# Altium PCB JTAG_USB.PcbDoc (part 2 of 2)
Units mil, origin at the board's own origin, x right, y up, seen from the top; angles counter-clockwise.
Board outline 1370 x 2285 mil, 4 copper layers (Top Layer, Int1 (GND), Int2 (PWR), Bottom Layer), stack 62.468 mil thick; 60 components, 42 nets, 234 pads, 167 vias.
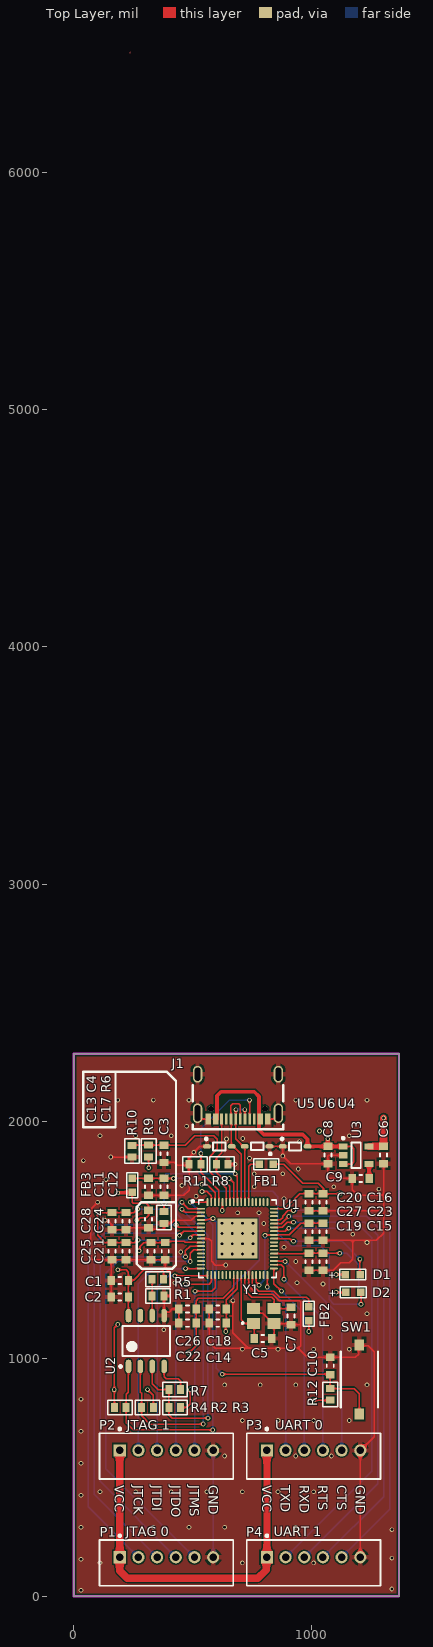
[diagram p0: Top Layer view]

## Silkscreen, mask and mechanical layers (free items; w line width, h text height) (continued)
Top Overlay: (continued)
  text "RXD" at 951,467 h40 r270
  text "RTS" at 1030,467 h40 r270
  text "CTS" at 1109,467 h40 r270
  text "GND" at 1188,467 h40 r270
  text "JTAG 0" at 218,252 h40
  text "UART 1" at 843,252 h40
Bottom Overlay:
  region: 6566.82,4438.35 6565.45,4432.88 6563.4,4430.82 6559.29,4432.19 6557.24,4438.35 6558.61,4453.4 6563.4,4459.56 6565.45,4458.88 6566.82,4453.4 6567.5,4439.03

## Text inside footprints (layer, text, board x,y; h text height)
D1: Top Overlay "+" at 1076,1368 h30 r270
D2: Top Overlay "+" at 1077.94,1292.94 h30 r270
J1: Mechanical 15 "PCB EDGE" at 806.38,2268.58 h30 r180